# Altium PCB CAN_PDM_Pcb.PcbDoc (part 1 of 3)
Units mm, origin at the board's own origin, x right, y up, seen from the top; angles counter-clockwise.
Board outline 120 x 90 mm, 4 copper layers (Top Layer, Int1 (GND-PWR), Int2 (PWR-3V3), Bottom Layer), stack 1.51 mm thick; 313 components, 200 nets, 938 pads, 544 vias.
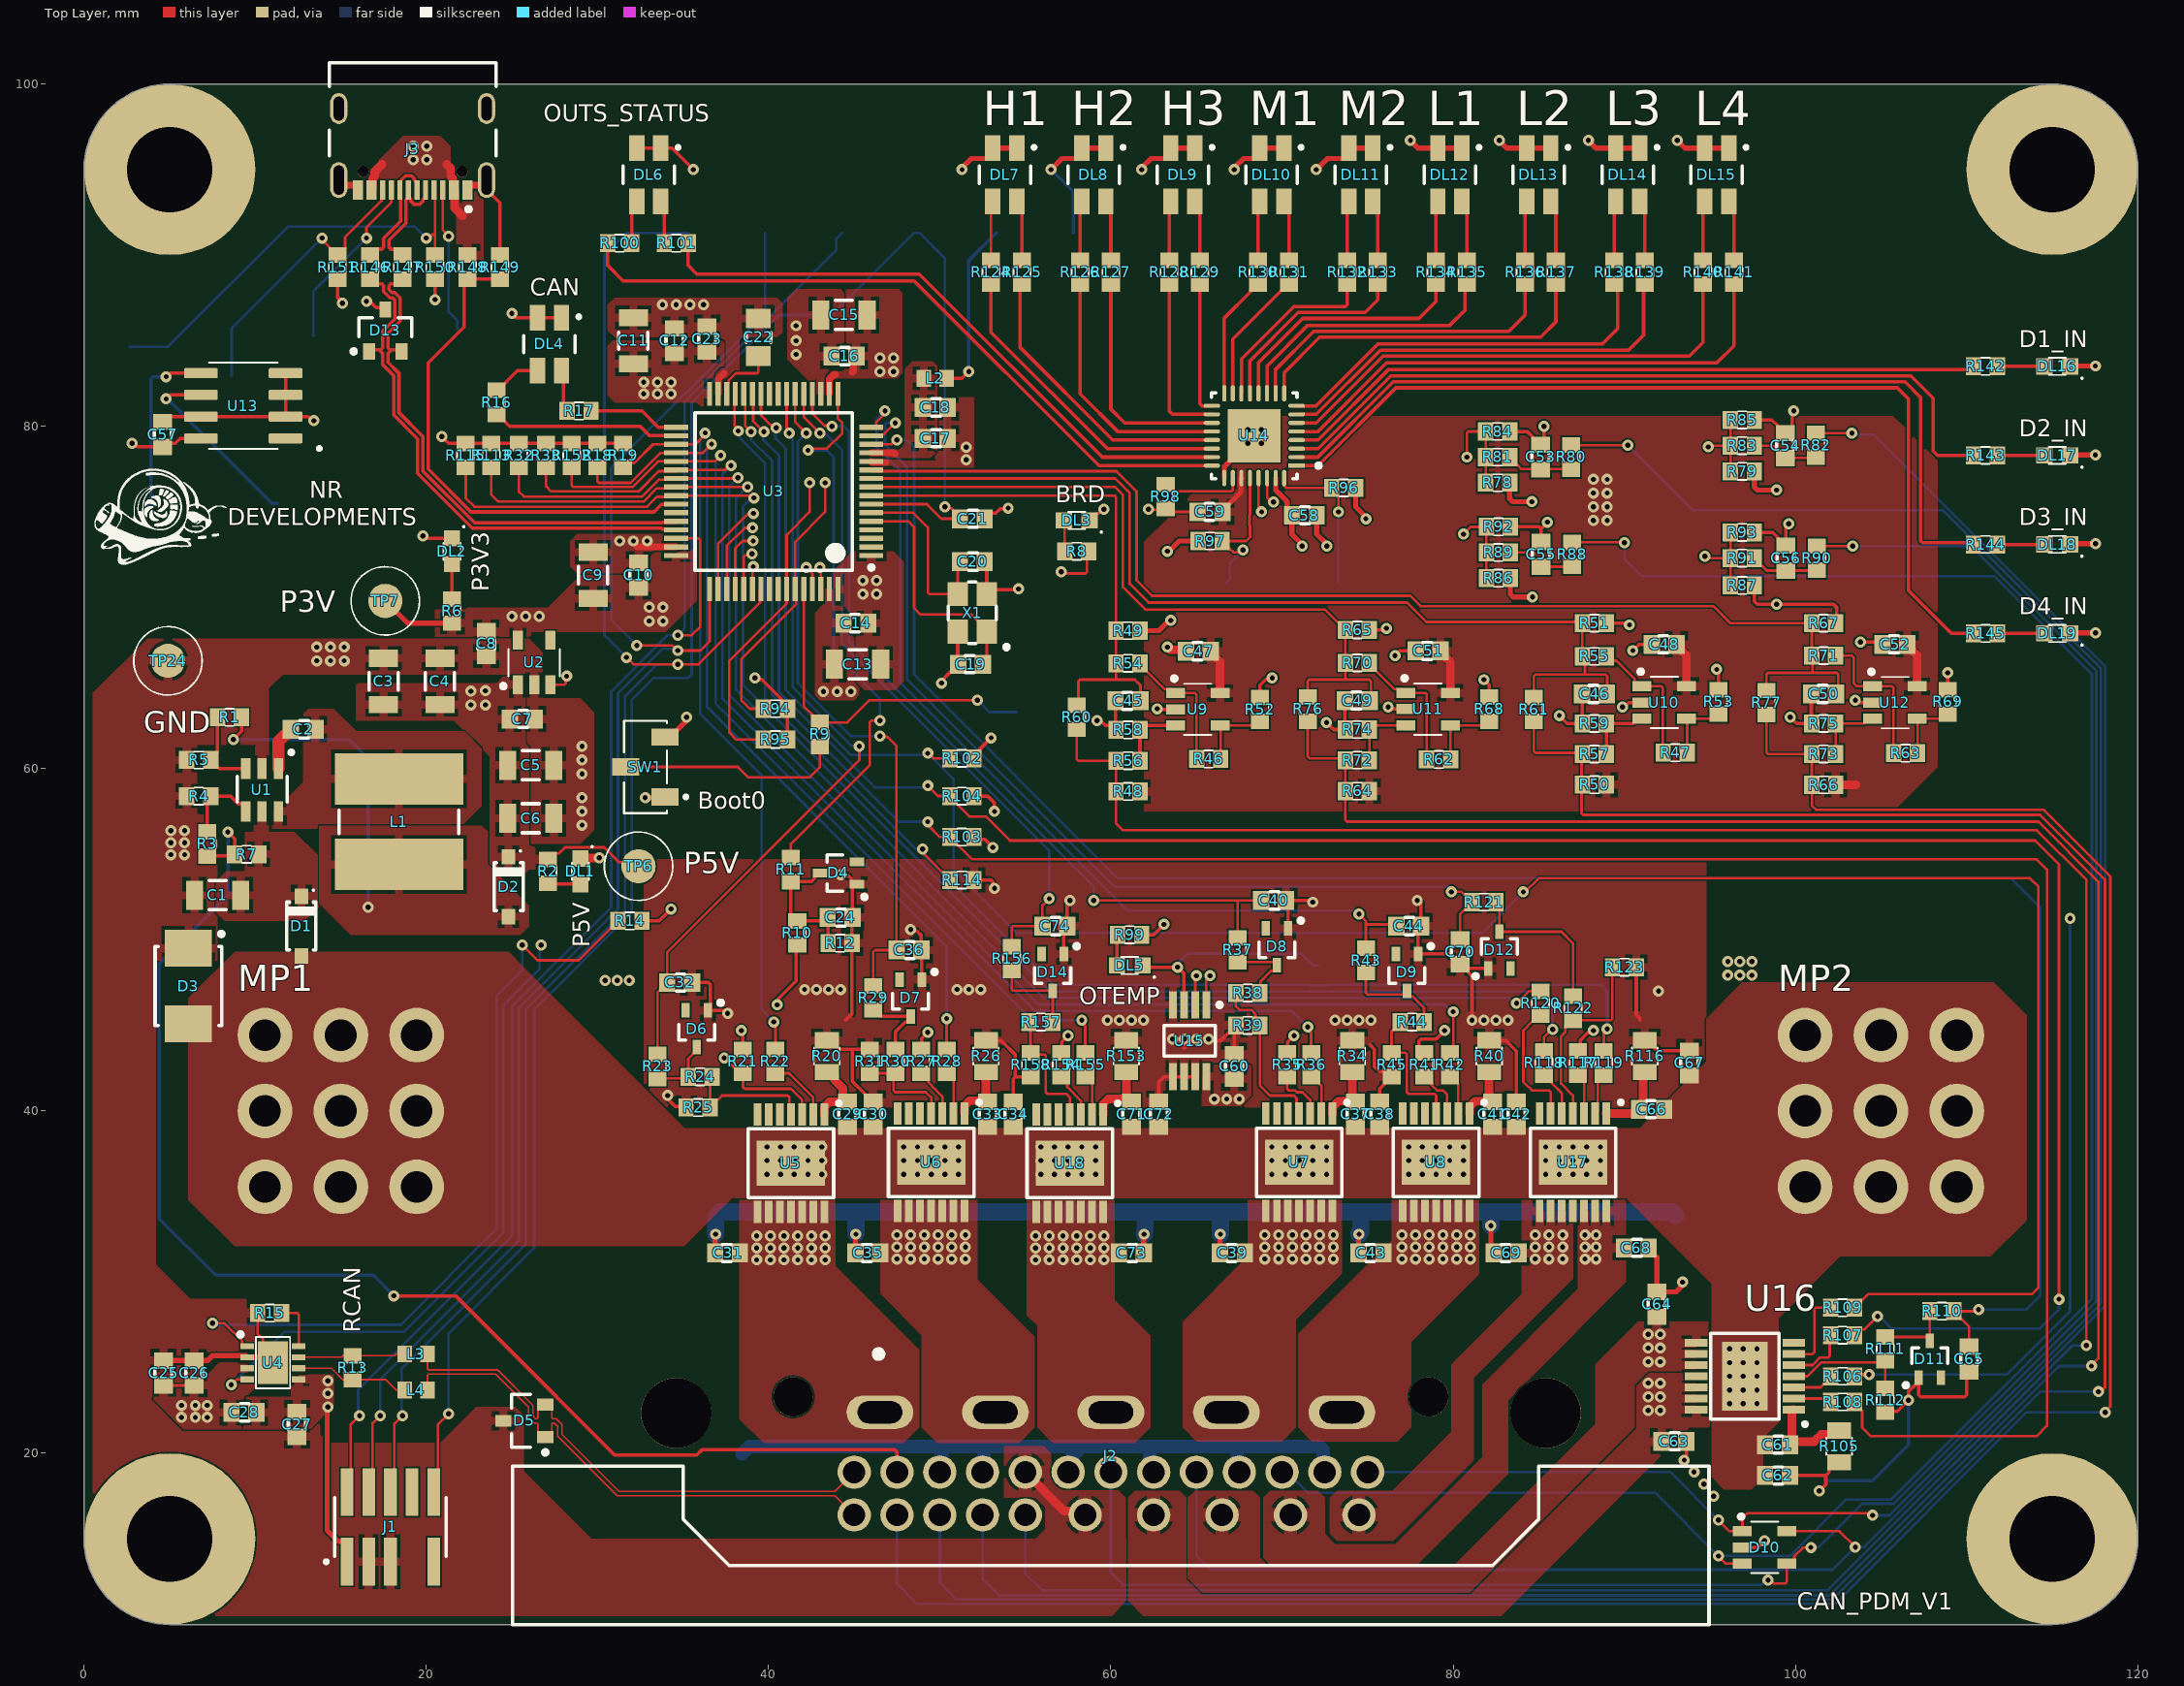
[diagram p0: Top Layer view]
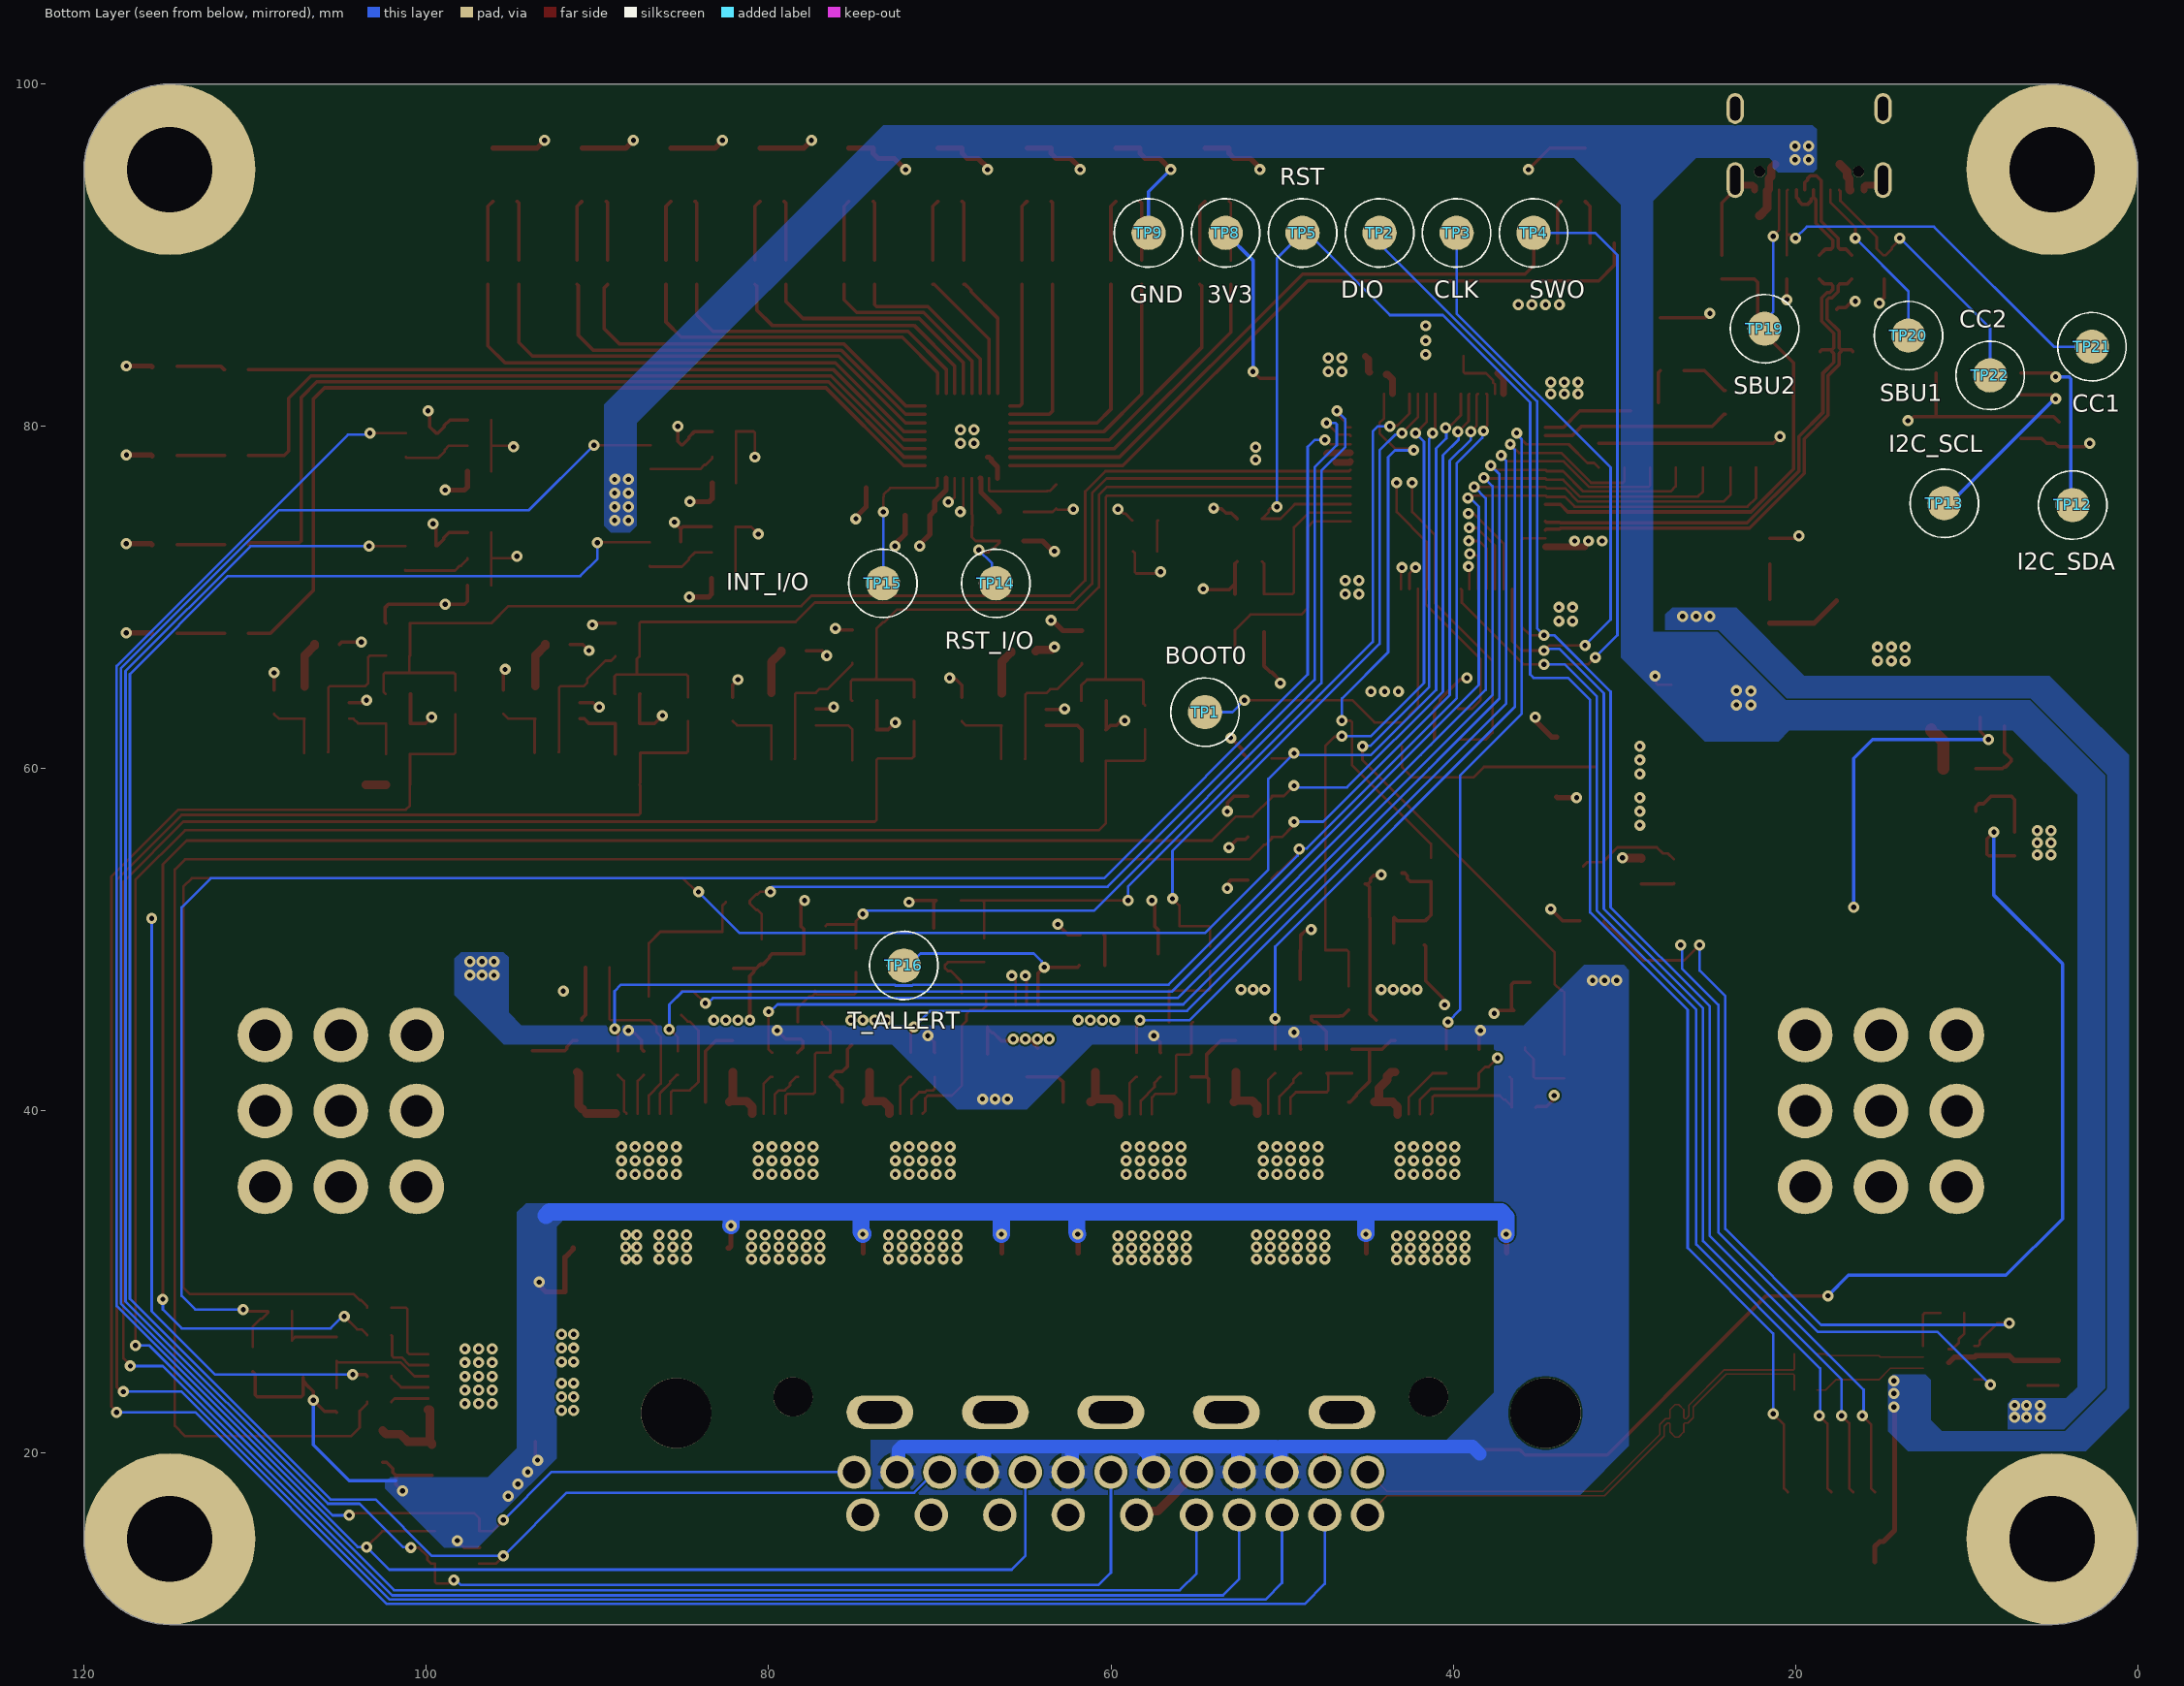
[diagram p1: Bottom Layer view, seen from below]
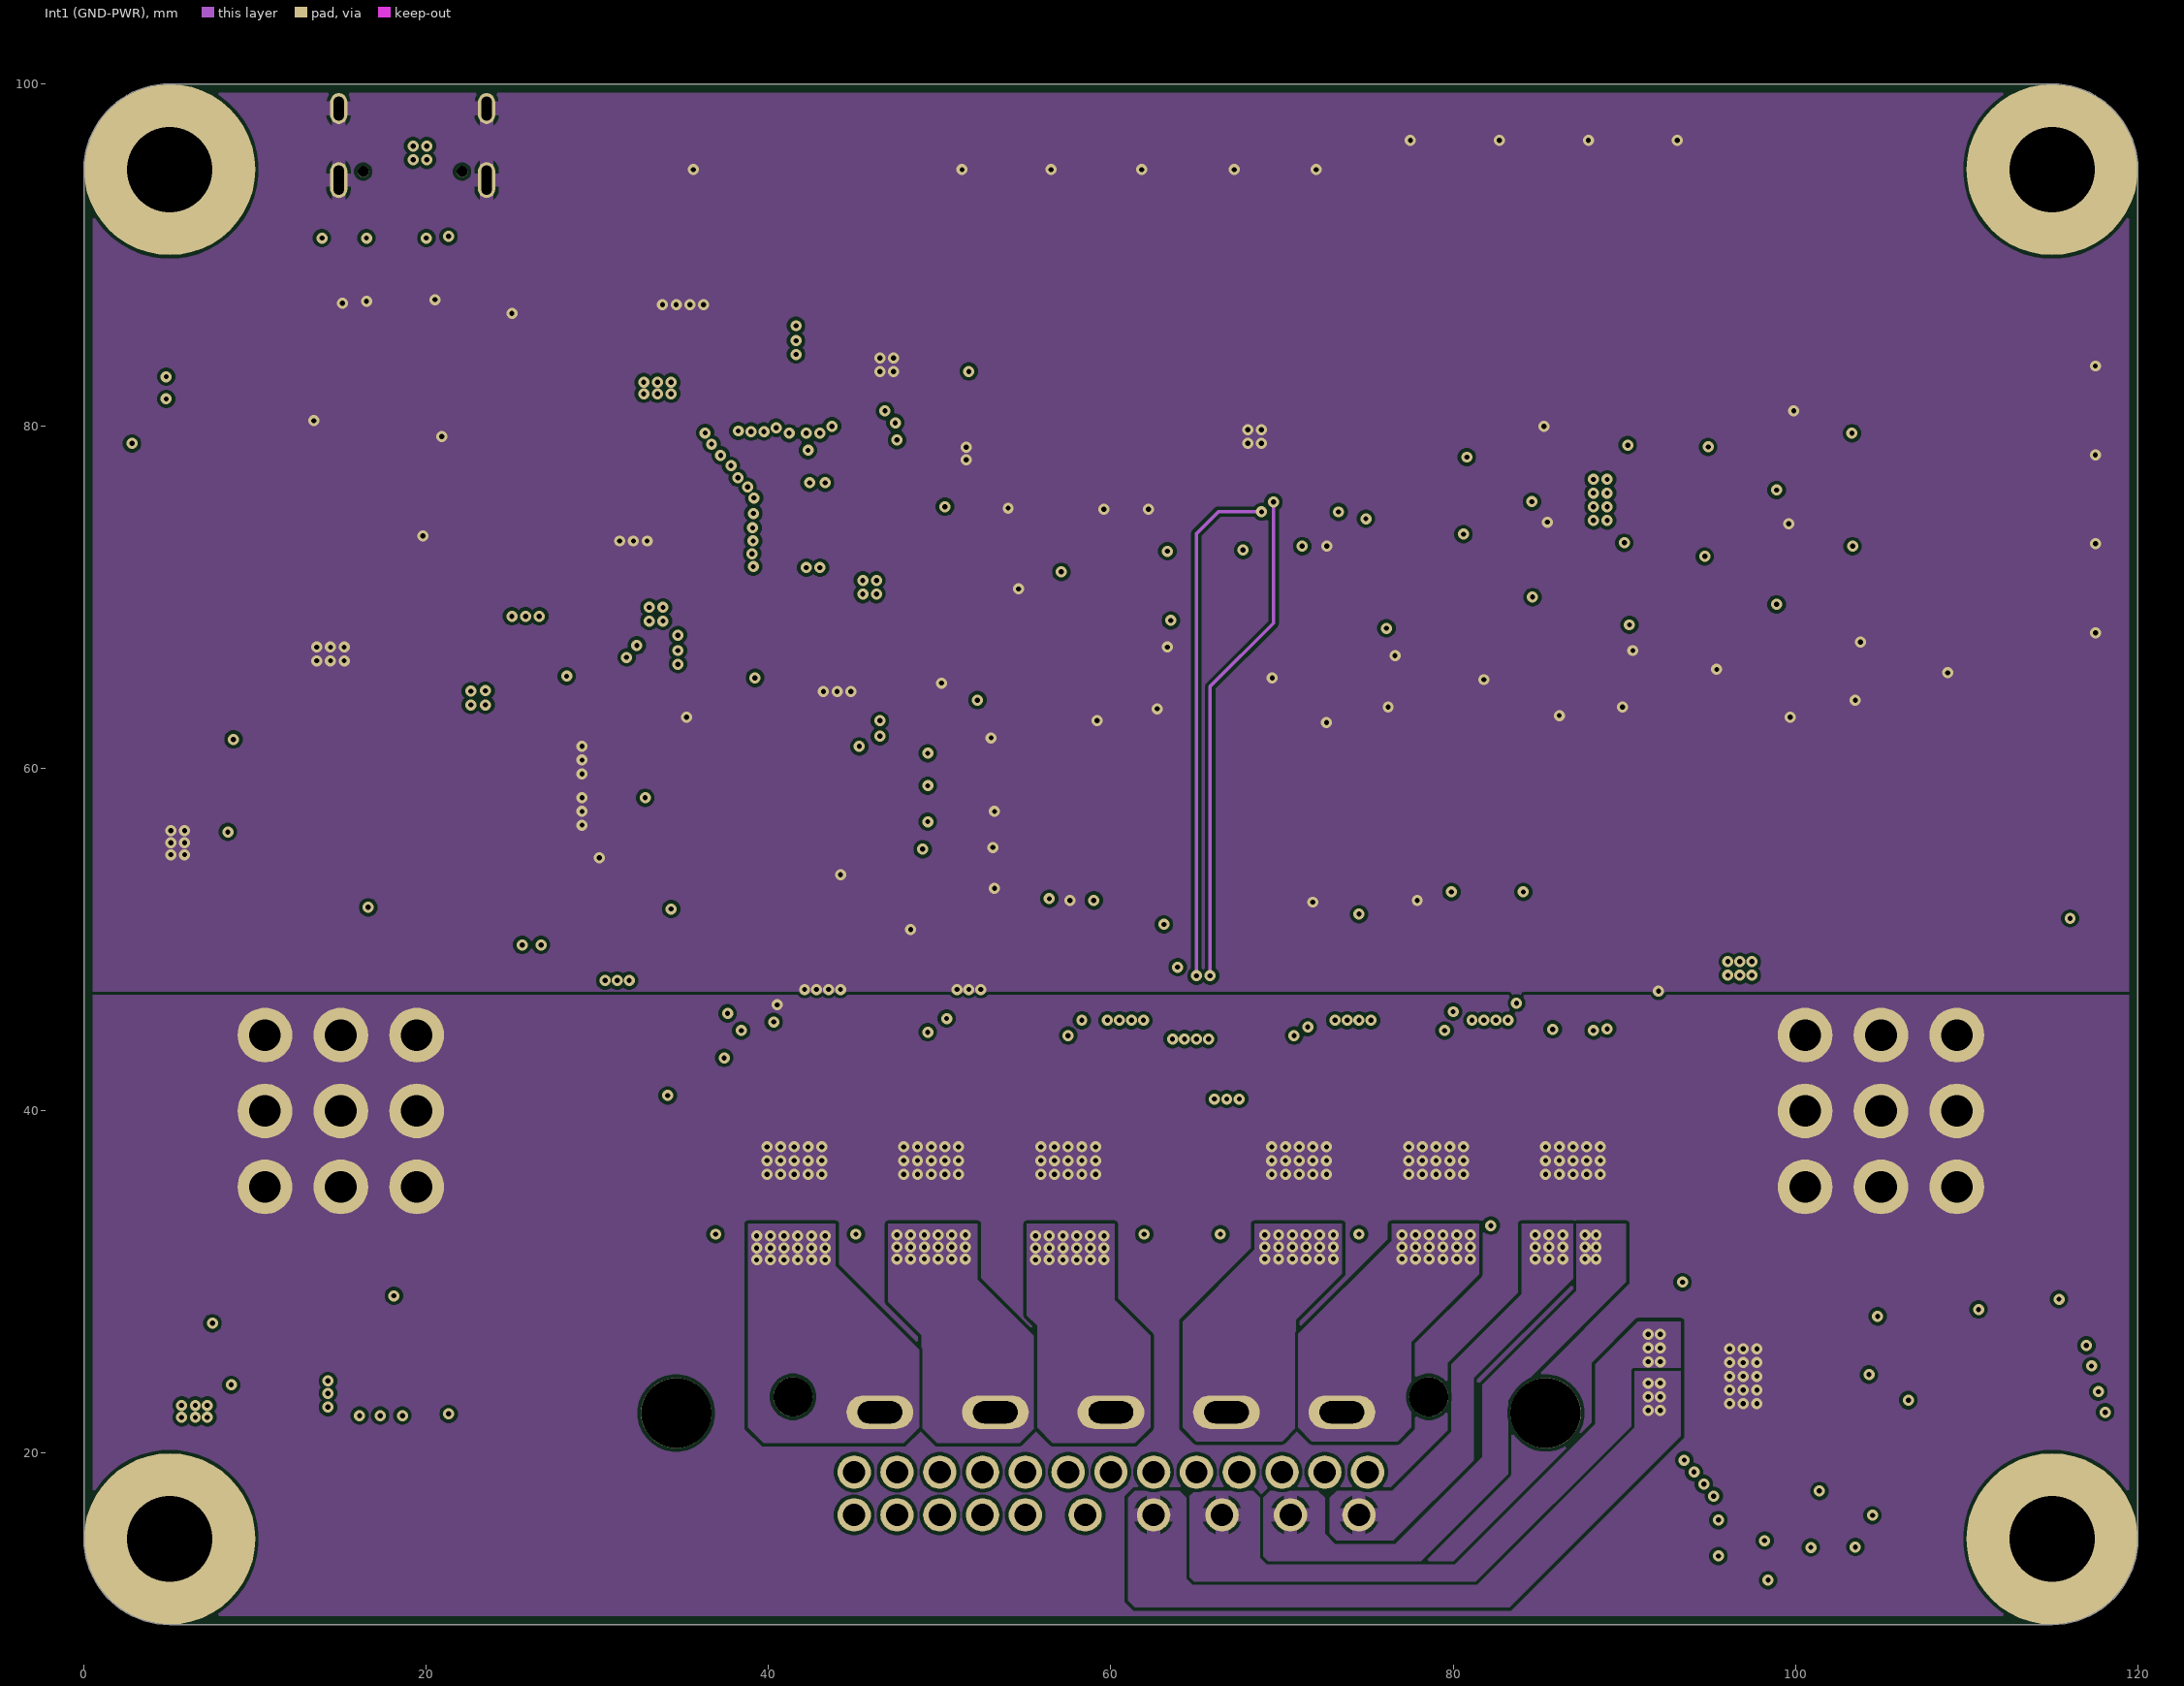
[diagram p2: Int1 (GND-PWR)]
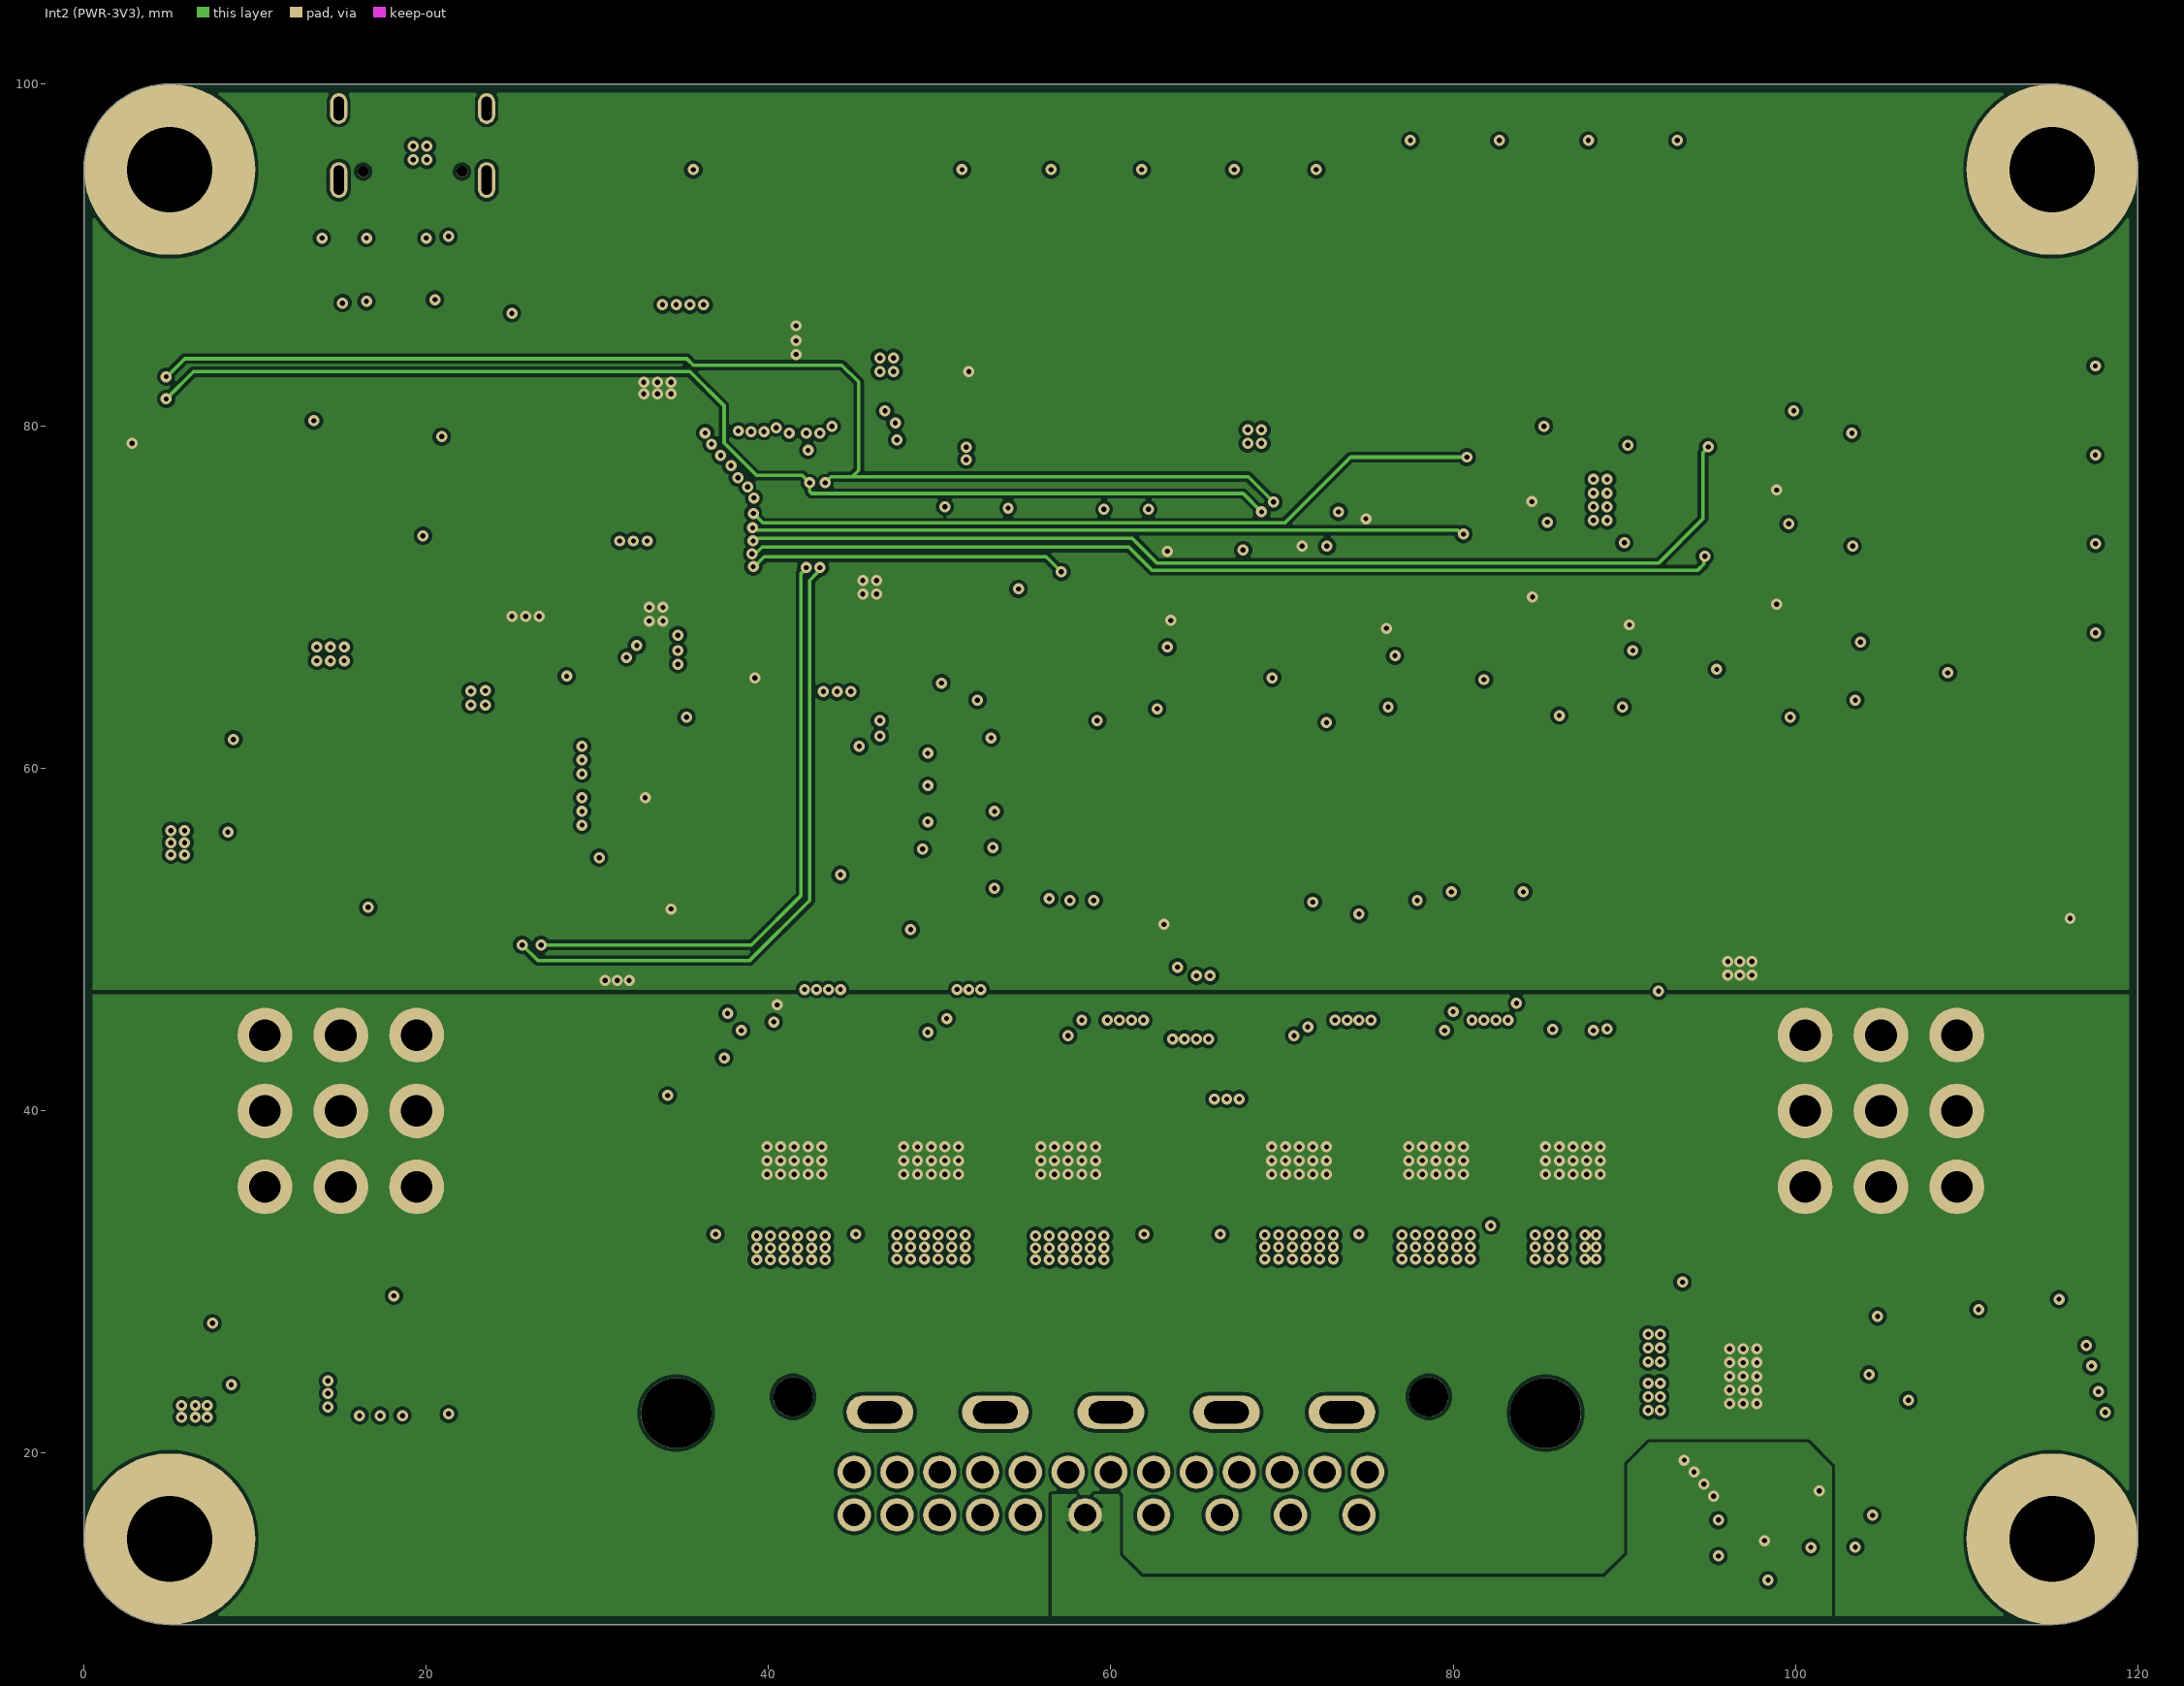
[diagram p3: Int2 (PWR-3V3)]
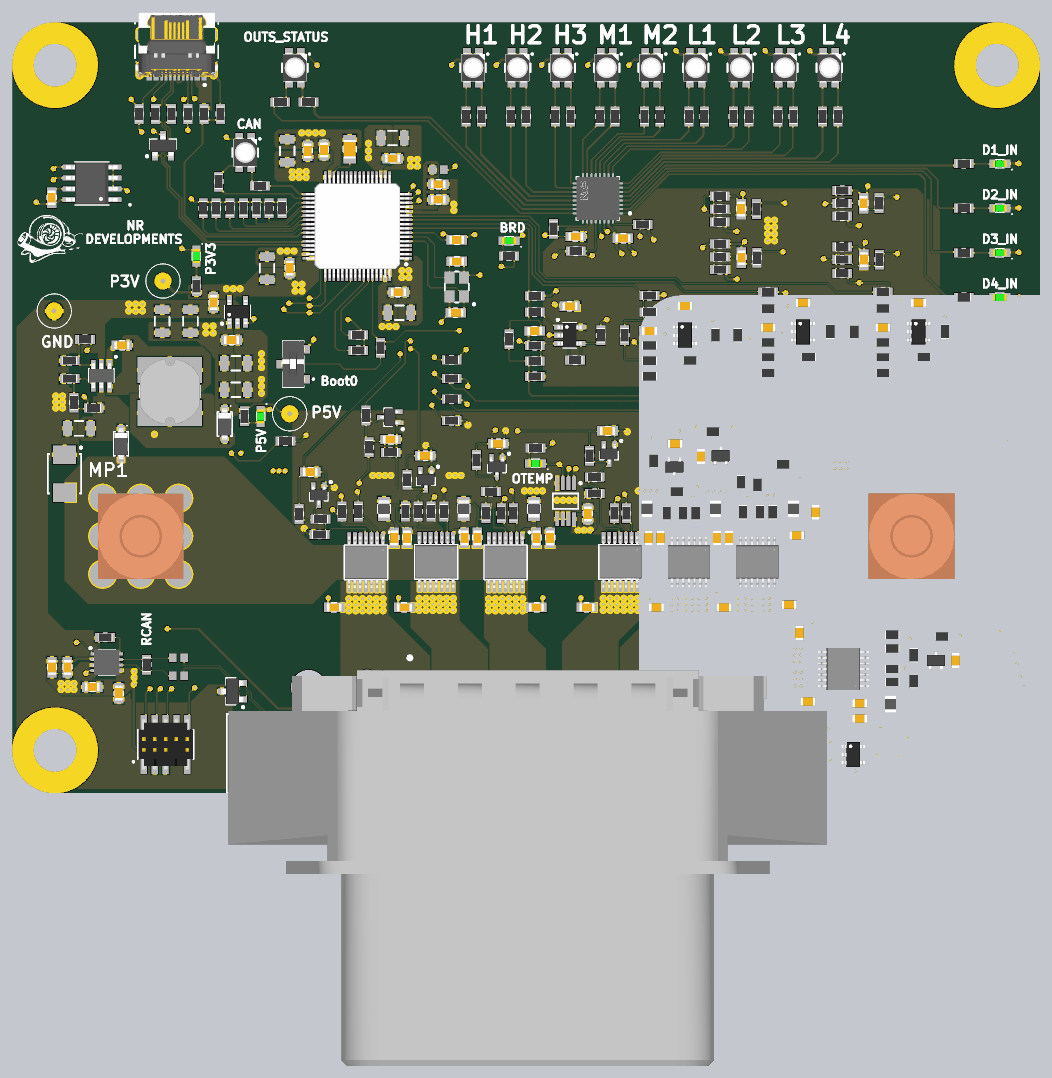
[diagram p6: 3D render of the assembled board from above, using the file's embedded part models]

## Layer stack, top to bottom
Top Solder: solder mask 0.0254, SM-001, Dk 4
Top Layer: signal copper 0.035
Dielectric 1: prepreg 0.125, PP-017, Dk 4.3
Dielectric 2: prepreg 0.125, PP-017, Dk 4.3
Int1 (GND-PWR): signal copper 0.07
Dielectric 3: core 0.8, Core-039, Dk 4.8
Int2 (PWR-3V3): signal copper 0.07
Dielectric 4: prepreg 0.125, PP-017, Dk 4.3
Dielectric 5: prepreg 0.125, PP-017, Dk 4.3
Bottom Layer: signal copper 0.035
Bottom Solder: solder mask 0.0254, SM-001, Dk 4

## Board outline
0,15 0,95 cw(c5,95) 5,100 115,100 cw(c115,95) 120,95 120,15 cw(c115,15) 115,10 5,10 cw(c5,15)

## Design rules (kind name [scope] priority, off if disabled: settings)
BoardOutlineClearance [All] p1: gap=0.5 ignorepadtopadclearanceinfootprint=FALSE
Clearance Clearance_int1 [OnLayer('Int1 (GND-PWR)')] p1: gap=0.2 ignorepadtopadclearanceinfootprint=TRUE
Clearance Clearance_int2 [OnLayer('Int2 (PWR-3V3)')] p2: gap=0.2 ignorepadtopadclearanceinfootprint=TRUE
Clearance Clearance_ALL [All] p3: gap=0.1 ignorepadtopadclearanceinfootprint=TRUE
DiffPairsRouting USB [InDifferentialPair('USBD')] p1: maxlimit=0.179 minlimit=0.11 mostfreqgap=0.179 toplayer_maxgap=0.11 toplayer_prefgap=0.11 toplayer_minwidth=0.2 toplayer_maxwidth=0.2 toplayer_prefwidth=0.2 midlayer1_mingap=0.179 midlayer1_minwidth=0.1 midlayer1_maxwidth=0.1 midlayer1_prefwidth=0.1 midlayer2_mingap=0.179 midlayer2_minwidth=0.1 midlayer2_maxwidth=0.1 midlayer2_prefwidth=0.1 bottomlayer_maxgap=0.11 bottomlayer_prefgap=0.11 bottomlayer_minwidth=0.2 bottomlayer_maxwidth=0.2 bottomlayer_prefwidth=0.2 impedanceprofiledriven=TRUE impedanceprofileid={897253C5-CBE6-43CE-975E-876387CCA2A0} impedanceprofilevalue=90.000000 maxuncoupledlength=12.7
DiffPairsRouting USB_1 [InDifferentialPair('MCU_USBD')] p2: maxlimit=0.179 minlimit=0.11 mostfreqgap=0.179 toplayer_maxgap=0.11 toplayer_prefgap=0.11 toplayer_minwidth=0.2 toplayer_maxwidth=0.2 toplayer_prefwidth=0.2 midlayer1_mingap=0.179 midlayer1_minwidth=0.1 midlayer1_maxwidth=0.1 midlayer1_prefwidth=0.1 midlayer2_mingap=0.179 midlayer2_minwidth=0.1 midlayer2_maxwidth=0.1 midlayer2_prefwidth=0.1 bottomlayer_maxgap=0.11 bottomlayer_prefgap=0.11 bottomlayer_minwidth=0.2 bottomlayer_maxwidth=0.2 bottomlayer_prefwidth=0.2 impedanceprofiledriven=TRUE impedanceprofileid={897253C5-CBE6-43CE-975E-876387CCA2A0} impedanceprofilevalue=90.000000 maxuncoupledlength=12.7
DiffPairsRouting CAN1 [InDifferentialPair('CAN0_IC')] p3: maxlimit=0.5 minlimit=0.151 mostfreqgap=0.5 toplayer_maxgap=0.151 toplayer_prefgap=0.151 toplayer_minwidth=0.1 toplayer_maxwidth=0.1 toplayer_prefwidth=0.1 midlayer1_mingap=0.5 midlayer1_minwidth=0.1 midlayer1_maxwidth=0.1 midlayer1_prefwidth=0.1 midlayer2_mingap=0.5 midlayer2_minwidth=0.1 midlayer2_maxwidth=0.1 midlayer2_prefwidth=0.1 bottomlayer_maxgap=0.151 bottomlayer_prefgap=0.151 bottomlayer_minwidth=0.1 bottomlayer_maxwidth=0.1 bottomlayer_prefwidth=0.1 impedanceprofiledriven=TRUE impedanceprofileid={D29A3864-303B-4307-AEF8-A4C566E0B745} impedanceprofilevalue=120.000000 maxuncoupledlength=12.7
DiffPairsRouting CAN [InDifferentialPair('CAN')] p4: maxlimit=0.5 minlimit=0.151 mostfreqgap=0.5 toplayer_maxgap=0.151 toplayer_prefgap=0.151 toplayer_minwidth=0.1 toplayer_maxwidth=0.1 toplayer_prefwidth=0.1 midlayer1_mingap=0.5 midlayer1_minwidth=0.1 midlayer1_maxwidth=0.1 midlayer1_prefwidth=0.1 midlayer2_mingap=0.5 midlayer2_minwidth=0.1 midlayer2_maxwidth=0.1 midlayer2_prefwidth=0.1 bottomlayer_maxgap=0.151 bottomlayer_prefgap=0.151 bottomlayer_minwidth=0.1 bottomlayer_maxwidth=0.1 bottomlayer_prefwidth=0.1 impedanceprofiledriven=TRUE impedanceprofileid={D29A3864-303B-4307-AEF8-A4C566E0B745} impedanceprofilevalue=120.000000 maxuncoupledlength=12.7
FabricationTestpoint [All] p1: side=3 testpointundercomponent=FALSE minsize=1.016 maxsize=2.54 preferedsize=1.524 minholesize=0 maxholesize=1.016 preferedholesize=0.813 testpointgrid=0.1 allowsidetop=TRUE allowsidebottom=TRUE usegrid=FALSE gridtolerance=0
Height [All] p1: minheight=0 maxheight=30 prefheight=12.7
HoleSize [All] p1: absolutevalues=TRUE maxlimit=6 minlimit=0.025 maxpercent=80.000 minpercent=20.000
HoleToHoleClearance [All] p1: gap=0.1 allowstackedmicrovias=TRUE
MatchedLengths RS485 [InDifferentialPair('RS485') OR InDifferentialPair('RS485_NF')] p1: tolerance=1 checknetsindiffpair=TRUE checkdiffpairvsdiffpair=FALSE checkxsignals=FALSE checkothers=FALSE
PolygonConnect PolygonConnect_Power [InNet('+12V')Or InNet('OUT_H1') Or  InNet('OUT_H2') Or InNet('OUT_H3')Or InNet('OUT_M1')Or InNet('OUT_M2')] p1: connectstyle=Direct reliefconductorwidth=0.254 reliefentries=4 polygonreliefangle="90 Angle" airgapwidth=0.254
PolygonConnect PolygonConnect_ALL [All] p2: thpad.connectstyle=Relief thpad.reliefconductorwidth=0.8 thpad.reliefentries=4 thpad.polygonreliefangle="90 Angle" thpad.airgapwidth=0.2 smdpad.connectstyle=Relief smdpad.reliefconductorwidth=0.5 smdpad.reliefentries=4 smdpad.polygonreliefangle="90 Angle" smdpad.airgapwidth=0.2 via.connectstyle=Direct via.reliefconductorwidth=0.254 via.reliefentries=4 via.polygonreliefangle="90 Angle" via.airgapwidth=0.254
RoutingVias [All] p1: holewidth=0.3 width=0.65 viastyle="Through Hole" minholewidth=0.3 minwidth=0.65 maxholewidth=0.5 maxwidth=1
SilkToSolderMaskClearance [IsPad] p1: minsilkscreentomaskgap=0.1 clearancetoexposedcopper=TRUE
SolderMaskExpansion SolderMaskExpansion_VIA [IsVia] p1: expansion=-1 istentingtop=FALSE
SolderMaskExpansion [All] p2: expansion=0.102 istentingtop=FALSE
SupplyNets "Schematic Supply Nets_1" [InNet('+12VPRT')] p1: voltage=0.000
SupplyNets "Schematic Supply Nets_5" [InNet('+12V')] p2: voltage=0.000
SupplyNets "Schematic Supply Nets_4" [InNet('IGNITION')] p3: voltage=0.000
SupplyNets "Schematic Supply Nets_3" [InNet('GND')] p4: voltage=0.000
SupplyNets "Schematic Supply Nets_2" [InNet('+3V3')] p5: voltage=0.000
SupplyNets "Schematic Supply Nets" [InNet('5V')] p6: voltage=0.000
ViasUnderSMD [All] p1: allowed=FALSE
Width [All] p1: maxlimit=1 minlimit=0.15 preferedwidth=0.2 toplayer_prefwidth=0.15 midlayer1_minwidth=0.2 midlayer2_minwidth=0.2 bottomlayer_prefwidth=0.15 minimp=50.000000 maximp=50.000000 favimp=50.000000
24 further rules are at their usual default settings.

## Classes and differential pairs
component class USB: D13 J3 R146 R147 R148 R149 R150 R151 TP19 TP20 TP21 TP22
component class SENSOR_INP: C45 C46 C47 C48 C49 C50 C51 C52 R46 R47 R48 R49 R50 R51 R52 R53 R54 R55 R56 R57 R58 R59 R60 R61 R62 R63 R64 R65 R66 R67 R68 R69 R70 R71 R72 R73 R74 R75 R76 R77 U9 U10 U11 U12
component class PWR: C1 C2 C3 C4 C5 C6 C7 C8 D1 D2 D3 DL1 DL2 L1 MP1 MP2 R1 R2 R3 R4 R5 R6 R7 TP6 TP7 TP24 U1 U2
component class MID_CURR_MOS: C37 C38 C39 C40 C41 C42 C43 C44 D8 D9 R32 R33 R34 R35 R36 R37 R38 R39 R40 R41 R42 R43 R44 R45 U7 U8
component class MCU: C9 C10 C11 C12 C13 C14 C15 C16 C17 C18 C19 C20 C21 C22 C23 C24 D4 DL3 J1 L2 R8 R9 R10 R11 R12 SW1 TP1 TP2 TP3 TP4 TP5 TP8 TP9 U3 X1
component class LOW_CURR_MOS: C61 C62 C63 C64 C65 C66 C67 C68 C69 C70 D11 D12 R102 R103 R104 R105 R106 R107 R108 R109 R110 R111 R112 R113 R114 R115 R116 R117 R118 R119 R120 R121 R122 R123 U16 U17
component class LED_STATUS_OUTPUTS: DL7 DL8 DL9 DL10 DL11 DL12 DL13 DL14 DL15 R124 R125 R126 R127 R128 R129 R130 R131 R132 R133 R134 R135 R136 R137 R138 R139 R140 R141
component class LED_STATUS_INPUT: DL16 DL17 DL18 DL19 R142 R143 R144 R145
component class I2C: C57 C58 C59 C60 DL5 DL6 R94 R95 R96 R97 R98 R99 R100 R101 TP12 TP13 TP14 TP15 TP16 U13 U14 U15
component class HIGH_CURR_MOS: C29 C30 C31 C32 C33 C34 C35 C36 D6 D7 R18 R19 R20 R21 R22 R23 R24 R25 R26 R27 R28 R29 R30 R31 U5 U6
component class HIGH_CURR_MOS2: C71 C72 C73 C74 D14 R152 R153 R154 R155 R156 R157 R158 U18
component class DIGITAL_INP: C53 C54 C55 C56 D10 R78 R79 R80 R81 R82 R83 R84 R85 R86 R87 R88 R89 R90 R91 R92 R93
component class CONNECTOR: J2
component class CAN: C25 C26 C27 C28 D5 DL4 L3 L4 R13 R14 R15 R16 R17 U4
differential pair USBD: +USBD_P -USBD_N
differential pair MCU_USBD: +MCU_USBD_P -MCU_USBD_N
differential pair CAN: +CAN_P -CAN_N
differential pair CAN0_IC: +CAN0_IC_P -CAN0_IC_N

## Components (designator, comment, footprint, x,y, rotation, side; value= is the part's Value field where it differs from the comment)
C1 "CAP" CAPC3216X16M 7.8,52.6 r180 top value=2u2
C2 "CAP" CAPC1608X09M 12.8,62.3 r0 top value=100n
C3 "CAP" CAPC3216X16M 17.5,65.1 r90 top value=10u
C4 "CAP" CAPC3216X16M 20.8,65.1 r90 top value=10u
C5 "CAP" CAPC3216X16M 26.1,60.2 r0 top value=10u
C6 "CAP" CAPC3216X16M 26.1,57.1 r0 top value=10u
C7 "CAP" CAPC1608X09M 25.6,62.9 r0 top value=1u
C8 "CAP" CAPC1608X09M 23.5,67.3 r270 top value=1u
C9 "CAP" CAPC3216X16M 29.75,71.3 r90 top value=10u
C10 "CAP" CAPC1608X09M 32.4,71.3 r90 top value=100n
C11 "CAP" CAPC3216X16M 32.1,85 r90 top value=10u
C12 "CAP" CAPC1608X09M 34.5,85 r90 top value=100n
C13 "CAP" CAPC3216X16M 45.2,66.1 r180 top value=10u
C14 "CAP" CAPC1608X09M 45.1,68.5 r180 top value=100n
C15 "CAP" CAPC3216X16M 44.4,86.5 r0 top value=10u
C16 "CAP" CAPC1608X09M 44.4,84.1 r0 top value=100n
C17 "CAP" CAPC1608X09M 49.735,79.3 r0 top value=100n
C18 "CAP" CAPC1608X09M 49.735,81.1 r0 top value=1u
C19 "CAP" CAPC1608X09M 51.8,66.1 r180 top value=27p
C20 "CAP" CAPC1608X09M 51.9,72.1 r0 top value=27p
C21 "CAP" CAPC1608X09M 51.9,74.6 r0 top value=100n
C22 "CAP" CAPC2012X14N 39.4,85.2 r90 top value=4u7
C23 "CAP" CAPC1608X09M 36.4,85.1 r90 top value=100n
C24 "CAP" CAPC1608X09M 44.175,51.3 r0 top value=100n
C25 "CAP" CAPC1608X09M 4.638,24.69 r90 top value=100n
C26 "CAP" CAPC1608X09M 6.438,24.69 r90 top value=47n
C27 "CAP" CAPC1608X09M 12.438,21.69 r270 top value=100n
C28 "CAP" CAPC1608X09M 9.338,22.39 r0 top value=100n
C29 "CAP" CAPC1608X09M 44.6,39.8 r90 top value=47n
C30 "CAP" CAPC1608X09M 46.1,39.8 r90 top value=100n
C31 "CAP" CAPC1608X09M 37.6,31.7 r180 top value=10n
C32 "CAP" CAPC1608X09M 34.8,47.5 r0 top value=220p
C33 "CAP" CAPC1608X09M 52.8,39.8 r90 top value=47n
C34 "CAP" CAPC1608X09M 54.3,39.8 r90 top value=100n
C35 "CAP" CAPC1608X09M 45.8,31.7 r180 top value=10n
C36 "CAP" CAPC1608X09M 48.2,49.4 r0 top value=220p
C37 "CAP" CAPC1608X09M 74.3,39.8 r90 top value=47n
C38 "CAP" CAPC1608X09M 75.7,39.8 r90 top value=100n
C39 "CAP" CAPC1608X09M 67.1,31.7 r180 top value=10n
C40 "CAP" CAPC1608X09M 69.5,52.3 r0 top value=220p
C41 "CAP" CAPC1608X09M 82.3,39.8 r90 top value=47n
C42 "CAP" CAPC1608X09M 83.7,39.8 r90 top value=100n
C43 "CAP" CAPC1608X09M 75.2,31.7 r180 top value=10n
C44 "CAP" CAPC1608X09M 77.4,50.8 r0 top value=220p
C45 "CAP" CAPC1608X09M 61,63.961 r180 top
C46 "CAP" CAPC1608X09M 88.25,64.361 r180 top
C47 "CAP" CAPC1608X09M 65.112,66.861 r180 top value=100n
C48 "CAP" CAPC1608X09M 92.33,67.261 r180 top value=100n
C49 "CAP" CAPC1608X09M 74.4,63.975 r180 top
C50 "CAP" CAPC1608X09M 101.65,64.361 r180 top
C51 "CAP" CAPC1608X09M 78.536,66.875 r180 top value=100n
C52 "CAP" CAPC1608X09M 105.812,67.261 r180 top value=100n
C53 "CAP" CAPC1608X09M 85.1,78.2 r90 top value=10n
C54 "CAP" CAPC1608X09M 99.4,78.875 r90 top value=10n
C55 "CAP" CAPC1608X09M 85.139,72.525 r90 top value=10n
C56 "CAP" CAPC1608X09M 99.439,72.3 r90 top value=10n
C57 "CAP" CAPC1608X09M 4.6,79.525 r90 top value=100n
C58 "CAP" CAPC1608X09M 71.3,74.8 r0 top value=100n
C59 "CAP" CAPC1608X09M 65.8,75 r180 top value=1u
C60 "CAP" CAPC1608X09M 67.2,42.6 r90 top value=1u
C61 "CAP" CAPC1608X09M 98.95,20.5 r0 top value=47n
C62 "CAP" CAPC1608X09M 98.95,18.7 r0 top value=100n
C63 "CAP" CAPC1608X09M 92.9,20.7 r0 top value=10n
C64 "CAP" CAPC1608X09M 91.9,28.7 r90 top value=10n
C65 "CAP" CAPC1608X09M 110.15,25.5 r270 top value=220p
C66 "CAP" CAPC1608X09M 91.6,40.1 r180 top value=47n
C67 "CAP" CAPC1608X09M 93.8,42.8 r90 top value=100n
C68 "CAP" CAPC1608X09M 90.7,32 r0 top value=10n
C69 "CAP" CAPC1608X09M 83.1,31.7 r180 top value=10n
C70 "CAP" CAPC1608X09M 80.4,49.3 r270 top value=220p
C71 "CAP" CAPC1608X09M 61.2,39.8 r90 top value=47n
C72 "CAP" CAPC1608X09M 62.8,39.8 r90 top value=100n
C73 "CAP" CAPC1608X09M 61.195,31.7 r0 top value=10n
C74 "CAP" CAPC1608X09M 56.725,50.8 r0 top value=220p
D1 "Diode_Schottky" "SODFL360X130-2M -AC" 12.7,50.8 r270 top value=PMEG4010EGWX
D2 "Diode_Schottky" "SODFL360X130-2M -AC" 24.8,53.1 r270 top value=PMEG4010EGWX
D3 "Diode" ONSC-SMB-2 6.1,47.3 r270 top value=SZ1SMB20CAT3G
D4 "Diode_Schottky" "SOT65P210X100-3N - AC" 44.075,53.9 r180 top value=4V7
D5 "ESD_Diode" SOT95P240X120-3N 25.725,21.9 r180 top value=SM712-02HTG
D6 "Diode_Schottky" "SOT65P210X100-3N - AC" 35.8,44.8 r270 top value=5V
D7 "Diode_Schottky" "SOT65P210X100-3N - AC" 48.3,46.6 r270 top value=5V
D8 "Diode_Schottky" "SOT65P210X100-3N - AC" 69.7,49.6 r270 top value=5V
D9 "Diode_Schottky" "SOT65P210X100-3N - AC" 77.3,48.1 r270 top value=5V
D10 "Diode TVS" SOT95P280X145-5N 98.2,14.5 r0 top value=SP0504BAHTG
D11 "Diode_Schottky" "SOT65P210X100-3N - AC" 107.85,25.5 r90 top value=5V
D12 "Diode_Schottky" "SOT65P210X100-3N - AC" 82.7,49.4 r90 top value=5V
D13 "SM712-02HTG" SOT95P240X120-3N 17.6,85.6 r90 top
D14 "Diode_Schottky" "SOT65P210X100-3N - AC" 56.6,48.1 r270 top value=5V
DL1 "Led_Green" LED0603 29,54 r270 top value=150060GS75000
DL2 "Led_Green" LED0603 21.5,72.7 r270 top value=150060GS75000
DL3 "Led_Green" LED0603 58,74.5 r180 top value=150060BS75000
DL4 "LED_Yellow_Blue" WURTH-SBTW_3528 27.2,84.8 r270 top value=150141YB73100
DL5 "LED_Red" LED0603 61.1,48.5 r180 top value=150060RS75000
DL6 "LED_Yellow_Blue" WURTH-SBTW_3528 33,94.7 r270 top value=150141YB73100
DL7 "LED_Red_Green" WURTH-SBTW_3528 53.8,94.7 r270 top value=150141RV73100
DL8 "LED_Red_Green" WURTH-SBTW_3528 59,94.7 r270 top value=150141RV73100
DL9 "LED_Red_Green" WURTH-SBTW_3528 64.2,94.7 r270 top value=150141RV73100
DL10 "LED_Red_Green" WURTH-SBTW_3528 69.4,94.7 r270 top value=150141RV73100
DL11 "LED_Red_Green" WURTH-SBTW_3528 74.6,94.7 r270 top value=150141RV73100
DL12 "LED_Red_Green" WURTH-SBTW_3528 79.8,94.7 r270 top value=150141RV73100
DL13 "LED_Red_Green" WURTH-SBTW_3528 85,94.7 r270 top value=150141RV73100
DL14 "LED_Red_Green" WURTH-SBTW_3528 90.2,94.7 r270 top value=150141RV73100
DL15 "LED_Red_Green" WURTH-SBTW_3528 95.4,94.7 r270 top value=150141RV73100
DL16 "Led_Green" LED0603 115.3,83.5 r180 top value=150060BS55040
DL17 "Led_Green" LED0603 115.3,78.3 r180 top value=150060BS55040
DL18 "Led_Green" LED0603 115.3,73.1 r180 top value=150060BS55040
DL19 "Led_Green" LED0603 115.3,67.9 r180 top value=150060BS55040
J1 "Connector" SAMTEC_FTSH-105-X-X-DV-007-P-X 17.9,15.7 r0 top value=FTSH-105-01-L-DV-007-K
J2 "Connector" MOLEX_0477450100 60,19.85 r0 top locked value=477450100
J3 "USB4105-GF-A" GCT-USB4105-GF-A 19.2,97.4 r180 top
L1 "IND" BOURNS_SDE0805A 18.4,56.9 r270 top value=18u
L2 "IND" INDC1608X09N 49.735,82.8 r180 top value="600 R"
L3 "IND" INDC1608X09N 19.4,25.8 r0 top value=BLM18HB331SN1D
L4 "IND" INDC1608X09N 19.4,23.7 r0 top value=BLM18HB331SN1D
MP1 "Connector" WURTH_74651195 15,40 r0 top value=74651195R
MP2 "Connector" WURTH_74651195 105,40 r0 top value=74651195R
R1 "Res" RESC1608X06M 8.5,63 r0 top value=88K7
R2 "Res" RESC1608X06M 27.1,54 r90 top value=1K3
R3 "Res" RESC1608X06M 7.2,55.6 r90 top value=10K
R4 "Res" RESC1608X06M 6.7,58.4 r0 top value=10K
R5 "Res" RESC1608X06M 6.7,60.5 r0 top value=22K1
R6 "Res" RESC1608X06M 21.5,69.2 r270 top value=560R
R7 "Res" RESC1608X06M 9.5,55 r180 top value=0R
R8 "Res" RESC1608X06M 58,72.7 r0 top value=560R
R9 "Res" RESC1608X06M 43,62 r90 top value=10K
R10 "Res" RESC1608X06M 41.675,50.4 r270 top value=51K
R11 "Res" RESC1608X06M 41.3,54.1 r90 top value=0R
R12 "Res" RESC1608X06M 44.175,49.8 r180 top value=7K5
R13 "Res" RESC1608X06M 15.7,25 r90 top value=120R
R14 "Res" RESC1608X06M 31.9,51.1 r0 top value=10K
R15 "Res" RESC1608X06M 10.838,28.19 r0 top value=10K
R16 "Res" RESC1608X06M 24.1,81.4 r270 top value=1K3
R17 "Res" RESC1608X06M 28.925,80.9 r0 top value=1K3
R18 "Res" RESC1608X06M 30,78.3 r270 top value=10K
R19 "Res" RESC1608X06M 31.5,78.3 r270 top value=10K
R20 "Res" RESC2012X06N 43.4,43.2 r90 top value=47R
R21 "Res" RESC1608X06M 38.5,42.9 r90 top value=4K7
R22 "Res" RESC1608X06M 40.4,42.9 r270 top value=4K7
R23 "Res" RESC1608X06M 33.5,42.6 r270 top value=4K7
R24 "Res" RESC1608X06M 36,42 r0 top value=4K7
R25 "Res" RESC1608X06M 35.875,40.2 r0 top value=1K2
R26 "Res" RESC2012X06N 52.7,43.2 r90 top value=47R
R27 "Res" RESC1608X06M 48.9,42.9 r90 top value=4K7
R28 "Res" RESC1608X06M 50.4,42.9 r270 top value=4K7
R29 "Res" RESC1608X06M 46.1,46.6 r270 top value=4K7
R30 "Res" RESC1608X06M 47.4,42.9 r270 top value=4K7
R31 "Res" RESC1608X06M 45.9,42.9 r270 top value=1K2
R32 "Res" RESC1608X06M 25.4,78.3 r270 top value=10K
R33 "Res" RESC1608X06M 27,78.3 r270 top value=10K
R34 "Res" RESC2012X06N 74.1,43.2 r90 top value=47R
R35 "Res" RESC1608X06M 70.3,42.7 r90 top value=4K7
R36 "Res" RESC1608X06M 71.7,42.7 r270 top value=4K7
R37 "Res" RESC1608X06M 67.4,49.4 r270 top value=4K7
R38 "Res" RESC1608X06M 68,46.9 r180 top value=4K7
R39 "Res" RESC1608X06M 68,45 r0 top value=1K2
R40 "Res" RESC2012X06N 82.1,43.2 r90 top value=47R
R41 "Res" RESC1608X06M 78.3,42.7 r90 top value=4K7
R42 "Res" RESC1608X06M 79.8,42.7 r270 top value=4K7
R43 "Res" RESC1608X06M 74.9,48.8 r270 top value=4K7
R44 "Res" RESC1608X06M 77.6,45.2 r180 top value=4K7
R45 "Res" RESC1608X06M 76.4,42.7 r90 top value=1K2
R46 "Res" RESC1608X06M 65.712,60.561 r0 top value=10K
R47 "Res" RESC1608X06M 92.975,60.927 r0 top value=10K
R48 "Res" RESC1608X06M 61,58.661 r0 top value=0R
R49 "Res" RESC1608X06M 61,68.061 r0 top value=0R
R50 "Res" RESC1608X06M 88.25,59.061 r0 top value=0R
R51 "Res" RESC1608X06M 88.25,68.497 r0 top value=0R
R52 "Res" RESC1608X06M 68.712,63.461 r90 top value=15K
R53 "Res" RESC1608X06M 95.5,63.9 r90 top value=15K
R54 "Res" RESC1608X06M 61,66.161 r180 top value=0R
R55 "Res" RESC1608X06M 88.25,66.561 r180 top value=0R
R56 "Res" RESC1608X06M 61,60.461 r0 top value=15K
R57 "Res" RESC1608X06M 88.25,60.852 r0 top value=15K
R58 "Res" RESC1608X06M 61,62.261 r0 top value=10K
R59 "Res" RESC1608X06M 88.25,62.639 r0 top value=10K
R60 "Res" RESC1608X06M 58,63 r90 top value=0R
R61 "Res" RESC1608X06M 84.712,63.461 r90 top value=0R
R62 "Res" RESC1608X06M 79.148,60.536 r0 top value=10K
R63 "Res" RESC1608X06M 106.435,60.903 r0 top value=10K
R64 "Res" RESC1608X06M 74.4,58.687 r0 top value=0R
R65 "Res" RESC1608X06M 74.4,68.101 r0 top value=0R
R66 "Res" RESC1608X06M 101.658,59.054 r0 top value=0R
R67 "Res" RESC1608X06M 101.65,68.5 r0 top value=0R
R68 "Res" RESC1608X06M 82.093,63.475 r90 top value=15K
R69 "Res" RESC1608X06M 108.9,63.9 r90 top value=15K
R70 "Res" RESC1608X06M 74.4,66.175 r180 top value=0R
R71 "Res" RESC1608X06M 101.65,66.6 r180 top value=0R
R72 "Res" RESC1608X06M 74.4,60.497 r0 top value=15K
R73 "Res" RESC1608X06M 101.65,60.857 r0 top value=15K
R74 "Res" RESC1608X06M 74.4,62.284 r0 top value=10K
R75 "Res" RESC1608X06M 101.65,62.639 r0 top value=10K
R76 "Res" RESC1608X06M 71.5,63.475 r90 top value=0R
R77 "Res" RESC1608X06M 98.312,63.861 r90 top value=0R
R78 "Res" RESC1608X06M 82.6,76.7 r0 top value=10K
R79 "Res" RESC1608X06M 96.9,77.375 r0 top value=10K
R80 "Res" RESC1608X06M 86.9,78.2 r270 top value=4K7
R81 "Res" RESC1608X06M 82.6,78.2 r180 top value=4K7
R82 "Res" RESC1608X06M 101.2,78.9 r270 top value=4K7
R83 "Res" RESC1608X06M 96.9,78.875 r180 top value=4K7
R84 "Res" RESC1608X06M 82.6,79.7 r180 top value=10K
R85 "Res" RESC1608X06M 96.9,80.375 r180 top value=10K
R86 "Res" RESC1608X06M 82.639,71.125 r0 top value=10K
R87 "Res" RESC1608X06M 96.9,70.7 r0 top value=10K
R88 "Res" RESC1608X06M 86.939,72.525 r270 top value=4K7
R89 "Res" RESC1608X06M 82.639,72.625 r180 top value=4K7
R90 "Res" RESC1608X06M 101.239,72.3 r270 top value=4K7
R91 "Res" RESC1608X06M 96.9,72.3 r180 top value=4K7
R92 "Res" RESC1608X06M 82.639,74.125 r180 top value=10K
R93 "Res" RESC1608X06M 96.9,73.8 r180 top value=10K
R94 "Res" RESC1608X06M 40.4,63.5 r0 top value=4K7
R95 "Res" RESC1608X06M 40.4,61.7 r0 top value=4K7
R96 "Res" RESC1608X06M 73.6,76.4 r0 top value=10K
R97 "Res" RESC1608X06M 65.8,73.3 r180 top value=10K
R98 "Res" RESC1608X06M 63.2,75.9 r270 top value=0R
R99 "Res" RESC1608X06M 61.1,50.3 r0 top value=560R
R100 "Res" RESC1608X06M 31.3,90.7 r180 top value=1K3
R101 "Res" RESC1608X06M 34.6,90.7 r0 top value=1K3
R102 "Res" RESC1608X06M 51.3,60.6 r180 top value=10K
R103 "Res" RESC1608X06M 51.3,56 r180 top value=10K
R104 "Res" RESC1608X06M 51.3,58.4 r180 top value=10K
R105 "Res" RESC2012X06N 102.55,20.4 r270 top value=47R
R106 "Res" RESC1608X06M 102.75,24.5 r0 top value=4K7
R107 "Res" RESC1608X06M 102.75,26.9 r180 top value=4K7
R108 "Res" RESC1608X06M 102.75,23 r180 top value=4K7
R109 "Res" RESC1608X06M 102.75,28.5 r180 top value=4K7
R110 "Res" RESC1608X06M 108.55,28.3 r180 top value=4K7
R111 "Res" RESC1608X06M 105.25,26.1 r270 top value=4K7
R112 "Res" RESC1608X06M 105.25,23.1 r90 top value=1K2
R113 "Res" RESC1608X06M 23.8,78.3 r270 top value=10K
R114 "Res" RESC1608X06M 51.3,53.5 r180 top value=10K
R115 "Res" RESC1608X06M 22.3,78.3 r270 top value=10K
R116 "Res" RESC2012X06N 91.2,43.2 r90 top value=47R
R117 "Res" RESC1608X06M 87.3,42.8 r90 top value=4K7
R118 "Res" RESC1608X06M 85.3,42.8 r270 top value=4K7
R119 "Res" RESC1608X06M 88.8,42.8 r270 top value=4K7
R120 "Res" RESC1608X06M 85.1,46.3 r270 top value=4K7
R121 "Res" RESC1608X06M 81.8,52.2 r0 top value=4K7
R122 "Res" RESC1608X06M 87,46 r270 top value=4K7
R123 "Res" RESC1608X06M 90,48.4 r180 top value=1K2
R124 "Res" RESC1608X06M 53,89 r270 top value=1K3
R125 "Res" RESC1608X06M 54.8,89 r270 top value=1K3
R126 "Res" RESC1608X06M 58.2,89 r270 top value=1K3
R127 "Res" RESC1608X06M 60,89 r270 top value=1K3
R128 "Res" RESC1608X06M 63.4,89 r270 top value=1K3
R129 "Res" RESC1608X06M 65.2,89 r270 top value=1K3
R130 "Res" RESC1608X06M 68.6,89 r270 top value=1K3
R131 "Res" RESC1608X06M 70.4,89 r270 top value=1K3
R132 "Res" RESC1608X06M 73.8,89 r270 top value=1K3
R133 "Res" RESC1608X06M 75.6,89 r270 top value=1K3
R134 "Res" RESC1608X06M 79,89 r270 top value=1K3
R135 "Res" RESC1608X06M 80.8,89 r270 top value=1K3
R136 "Res" RESC1608X06M 84.2,89 r270 top value=1K3
R137 "Res" RESC1608X06M 86,89 r270 top value=1K3
R138 "Res" RESC1608X06M 89.4,89 r270 top value=1K3
R139 "Res" RESC1608X06M 91.2,89 r270 top value=1K3
R140 "Res" RESC1608X06M 94.6,89 r270 top value=1K3
R141 "Res" RESC1608X06M 96.4,89 r270 top value=1K3
R142 "Res" RESC1608X06M 111.1,83.5 r180 top value=560R
R143 "Res" RESC1608X06M 111.1,78.3 r180 top value=560R
R144 "Res" RESC1608X06M 111.1,73.1 r180 top value=560R
R145 "Res" RESC1608X06M 111.1,67.9 r180 top value=560R
R146 "CRCW06030000Z0EAC" RESC1608X06M 16.7,89.3 r90 top value=0R
R147 "CRCW06030000Z0EAC" RESC1608X06M 18.6,89.3 r90 top value=0R
R148 "" RESC1608X06M 22.4,89.3 r90 top value=62K
R149 "" RESC1608X06M 24.3,89.3 r270 top value=120K
R150 "Resistor" RESC1608X06M 20.5,89.3 r90 top value=5K1
R151 "Resistor" RESC1608X06M 14.8,89.3 r90 top value=5K1
R152 "Res" RESC1608X06M 28.5,78.3 r270 top value=10K
R153 "Res" RESC2012X06N 60.9,43.2 r90 top value=47R
R154 "Res" RESC1608X06M 57.1,42.7 r90 top value=4K7
R155 "Res" RESC1608X06M 58.5,42.7 r270 top value=4K7
R156 "Res" RESC1608X06M 54.2,48.9 r270 top value=4K7
R157 "Res" RESC1608X06M 55.9,45.2 r180 top value=4K7
R158 "Res" RESC1608X06M 55.3,42.7 r90 top value=1K2
SW1 "Switch SPDT" SW_CJS-1200TA 32.8,60.1 r90 top value=CJS-1200TA
TP1 "BOOT0" TP_c200 54.5,63.3 r180 bottom
TP2 "DIO" TP_c200 44.3,91.3 r180 bottom
TP3 "CLK" TP_c200 39.8,91.3 r180 bottom
TP4 "SWO" TP_c200 35.3,91.3 r180 bottom
TP5 "RST" TP_c200 48.8,91.3 r180 bottom
TP6 "P5V" TP_c200 32.4,54.3 r0 top
TP7 "P3V" TP_c200 17.6,69.8 r0 top
TP8 "3V3" TP_c200 53.3,91.3 r180 bottom
TP9 "GND" TP_c200 57.8,91.3 r180 bottom
TP12 "I2C_SDA" TP_c200 3.8,75.4 r270 bottom
TP13 "I2C_SCL" TP_c200 11.3,75.5 r270 bottom
TP14 "RST_I/O" TP_c200 66.726,70.826 r180 bottom
TP15 "INT_I/O" TP_c200 73.326,70.826 r180 bottom
TP16 "T_ALLERT" TP_c200 72.1,48.5 r180 bottom
TP19 "SBU2" TP_c200 21.8,85.7 r0 bottom
TP20 "SBU1" TP_c200 13.4,85.3 r0 bottom
TP21 "CC1" TP_c200 2.675,84.65 r0 bottom
TP22 "CC2" TP_c200 8.625,82.975 r0 bottom
TP24 "GND" TP_c200 4.9,66.3 r0 top
U1 "DC DC" SOT95P280X145-6N 10.4,58.75 r270 top value=LV3842XDBVR
U2 "TLV75530PDBVR" SOT95P280X145-5N 26.3,66.2 r90 top value=TLV75533PDBVR
U3 "STM32F446RET6" STM-LQFP64_M 40.3,76.2 r180 top
U4 "TJA1051TK/3,118" SON65P300X300X100-9N-D 11.038,25.29 r0 top
U5 "BTS7002-1EPP" SOP65P600X115-15 41.3,36.95 r270 top value=BTS70021EPPXUMA1
U6 "BTS7002-1EPP" SOP65P600X115-15 49.5,37 r270 top value=BTS70021EPPXUMA1
U7 "BTS70041EPZXUMA1" SOP65P600X115-15 71,37 r270 top
U8 "BTS70041EPZXUMA1" SOP65P600X115-15 79,37 r270 top
U9 "TLV900" SOT95P280X145-5N 65.078,63.465 r0 top value=TLV9001IDBVR
U10 "TLV900" SOT95P280X145-5N 92.33,63.865 r0 top value=TLV9001IDBVR
U11 "TLV900" SOT95P280X145-5N 78.536,63.479 r0 top value=TLV9001IDBVR
U12 "TLV900" SOT95P280X145-5N 105.812,63.861 r0 top value=TLV9001IDBVR
U13 "MB85RC04V" SOIC127P600X175-8N 9.3,81.2 r180 top value=FM24CL16B-GTR
U14 "PCAL6524HEAZ" FP-SOT1426-1-IPC_A 68.376,79.45 r180 top
U15 "MCP9808-E/MS" MCHP-MSOP-MS8_N 64.6,44.1 r270 top
U16 "BTS70082EPZXUMA1" SOP65P600X115-15 97.05,24.5 r180 top
U17 "BTS70802EPAXUMA1" SOP65P600X115-15 87,37 r270 top
U18 "BTS7002-1EPP" SOP65P600X115-15 57.6,36.95 r270 top value=BTS70021EPPXUMA1
X1 "ABM8AIG-8.000MHZ-1Z-T" ABM8G_abracon 51.9,69.1 r90 top

## Footprints (in the part's own frame and the unit in brackets; to place one, negate y for a bottom-side part, rotate by r counter-clockwise, add the part's x,y. Pads: shape width x height; smd on the part's side, far side on the other; paste and mask are expansions set on the pad)
ABM8G_abracon [mm] "SMD Plastic Package Type  Body (2.5 x 3.2) Heigh 1mm"
  rect 1.4x1.2 smd mask+0.05: 1(-1.1,-0.85) 2(1.1,-0.85) 3(1.1,0.85) 4(-1.1,0.85)
  silkscreen extent -2.1,-2.1 1.8,1.4, body extent -1.65,-1.3 1.65,1.3, height 1
BOURNS_SDE0805A [mm]
  rect 3x7.5 smd: 1(-2.5,0) 2(2.5,0)
  silkscreen extent -0.68,-3.5 0.68,3.5, body extent -3.83,-3.5 3.83,3.5, height 5
CAPC1608X09M [mm] "Chip Capacitor, 2-Leads, Body 1,60x0,80mm, IPC Low Density"
  rect 0.95x1.1 smd: 1(-0.725,0) 2(0.725,0)
  silkscreen extent -0.2,-0.5 0.3,0.5, body extent -0.87,-0.48 0.87,0.48, height 0.92
CAPC2012X14N [mm] "Chip Capacitor, 2-Leads, Body 2,00x1,25mm, IPC Medium Density"
  rect 1.15x1.45 smd: 1(-1.1,0) 2(1.1,0)
  silkscreen extent -0.3,-0.73 0.3,0.73, body extent -1.1,-0.72 1.1,0.72, height 1.45
CAPC3216X16M [mm] "Chip Capacitor, 2-Leads, Body 3,20x1,60mm, IPC Low Density"
  rect 1x1.7 smd: 1(-1.35,0) 2(1.35,0)
  silkscreen extent -0.5,-0.85 0.5,0.85, body extent -1.7,-0.9 1.7,0.9, height 1.6
FP-SOT1426-1-IPC_A [mm]
  rect 0.961x0.239 smd paste+0 mask+0: 1(-2.476,1.75)
  rrect100% 0.961x0.239 smd paste+0 mask+0: 2(-2.476,1.25) 3(-2.476,0.75) 4(-2.476,0.25) 5(-2.476,-0.25) 6(-2.476,-0.75) 7(-2.476,-1.25) 8(-2.476,-1.75) 17(2.476,-1.75) 18(2.476,-1.25) 19(2.476,-0.75) 20(2.476,-0.25) 21(2.476,0.25) 22(2.476,0.75) 23(2.476,1.25) 24(2.476,1.75)
  rrect100% 0.239x0.961 smd paste+0 mask+0: 9(-1.75,-2.476) 10(-1.25,-2.476) 11(-0.75,-2.476) 12(-0.25,-2.476) 13(0.25,-2.476) 14(0.75,-2.476) 15(1.25,-2.476) 16(1.75,-2.476) 25(1.75,2.476) 26(1.25,2.476) 27(0.75,2.476) 28(0.25,2.476) 29(-0.25,2.476) 30(-0.75,2.476) 31(-1.25,2.476) 32(-1.75,2.476)
  rect 3.1x3.1 smd paste-1000 mask+0: 33(0,0)
  silkscreen extent -3.88,-2.5 2.5,2.5, body extent -3.46,-3.46 3.46,3.46, height 0.25
GCT-USB4105-GF-A [mm]
  rrect100% 1x2.1 hole 1.7 slot 0.6 at 0 deg paste-2539.97 mask+0: 1(-4.32,3.015) 2(4.32,3.015)
  rrect100% 1x1.8 hole 1.4 slot 0.6 at 0 deg paste-2539.97 mask+0: 3(-4.32,-1.165) 4(4.32,-1.165)
  rect 0.6x1.15 smd paste+0 mask+0: A1-B12(-3.2,3.59) A4-B9(-2.4,3.59) B1-A12(3.2,3.59) B4-A9(2.4,3.59)
  rect 0.3x1.15 smd paste+0 mask+0: A5(-1.25,3.59) A6(-0.25,3.59) A7(0.25,3.59) A8(1.25,3.59) B5(1.75,3.59) B6(0.75,3.59) B7(-0.75,3.59) B8(-1.75,3.59)
  round 0.65 hole 0.65 unplated paste-2539.97 mask+0: ""(-2.89,2.515) ""(2.89,2.515)
  silkscreen extent -4.86,-3.84 4.86,4.84, body extent -4.96,-3.94 4.96,4.27, height 0.25
INDC1608X09N [mm] "L 0603"
  rect 0.87x0.98 smd: 1(-0.665,0) 2(0.665,0)
  body extent -0.87,-0.48 0.87,0.47, height 0.95
LED0603 [mm] "Chip Diode, 2-Leads, Body 0603"
  rect 0.95x0.95 smd: A(0.75,0) C(-0.75,0)
  silkscreen extent -1.49,-0.5 0.5,0.74, body extent -0.81,-0.4 0.81,0.4, height 1.11
MCHP-MSOP-MS8_N [mm] "SOP, 8-Leads, Body 3x3mm, Pitch 0.65mm, IPC Medium Density"
  rect 1.6x0.45 smd: 1(-2.1,0.975) 2(-2.1,0.325) 3(-2.1,-0.325) 4(-2.1,-0.975) 5(2.1,-0.975) 6(2.1,-0.325) 7(2.1,0.325) 8(2.1,0.975)
  silkscreen extent -2.22,-1.5 0.9,1.88, body extent -1.5,-1.5 1.5,1.5, height 1.1
MOLEX_0477450100 [mm]
  oval 3.9x1.95 hole 1.3 slot 2.6 at 0 deg: 1(-13.5,2.55) 2(-6.75,2.55) 3(0,2.55) 4(6.75,2.55) 5(13.5,2.55)
  round 1.95 hole 1.3: 6(-15,-0.95) 7(-12.5,-0.95) 8(-10,-0.95) 9(-7.5,-0.95) 10(-5,-0.95) 11(-2.5,-0.95) 12(0,-0.95) 13(2.5,-0.95) 14(5,-0.95) 15(7.5,-0.95) 16(10,-0.95) 17(12.5,-0.95) 18(15,-0.95) 19(-15,-3.45) 20(-12.5,-3.45) 21(-10,-3.45) 22(-7.5,-3.45) 23(-5,-3.45) 24(-1.505,-3.45) 25(2.495,-3.45) 26(6.495,-3.45) 27(10.495,-3.45) 28(14.495,-3.45)
  round 4.1 hole 4.1 unplated: ""(-25.4,2.5) ""(25.4,2.5)
  round 2.3 hole 2.3 unplated: ""(-18.575,3.45) ""(18.575,3.45)
  silkscreen extent -34.95,-9.85 34.95,6.15, body extent -34.77,-41.72 35.14,4.48, height 28.43
ONSC-SMB-2 [mm] "SOJ, 2-Leads, Body 4.57x3.81mm"
  rect 2.159x2.743 smd: 1(-2.21,0) 2(2.21,0)
  silkscreen extent -3.16,-1.95 2.3,2.05, body extent -2.29,-1.91 2.28,1.91, height 2.52
RESC1608X06M [mm] "Chip Resistor, 2-Leads, Body 1,60x0,82mm, IPC Low Density"
  rect 0.9x1.05 smd: 1(-0.7,0) 2(0.7,0)
  silkscreen extent -0.25,-0.5 0.25,0.5, body extent -0.85,-0.47 0.85,0.48, height 0.55
RESC2012X06N [mm] "R 0805"
  rect 0.95x1.4 smd: 1(-0.925,0) 2(0.925,0)
  silkscreen extent -0.5,-0.75 0.5,0.75, body extent -1,-0.64 1,0.62, height 0.5
SAMTEC_FTSH-105-X-X-DV-007-P-X [mm]
  rect 0.74x2.79 smd: 1(-2.54,-2.035) 2(-2.54,2.035) 3(-1.27,-2.035) 4(-1.27,2.035) 5(0,-2.035) 6(0,2.035) 8(1.27,2.035) 9(2.54,-2.035) 10(2.54,2.035)
  silkscreen extent -3.85,-2.13 3.26,1.72, body extent -3.17,-2.92 3.17,2.92, height 6.11
"SODFL360X130-2M -AC" [mm] "SODFL, 2-Leads, Body 1,60x3,60mm, IPC Low Density"
  rect 0.9x0.8 smd: A(1.75,0) C(-1.75,0)
  silkscreen extent -2.15,-0.85 1.4,0.85, body extent -1.8,-0.8 1.8,0.8, height 1.3
SOIC127P600X175-8N [mm]
  rrect25% 1.97x0.59 smd: 1(-2.475,1.905) 2(-2.475,0.635) 3(-2.475,-0.635) 4(-2.475,-1.905) 5(2.475,-1.905) 6(2.475,-0.635) 7(2.475,0.635) 8(2.475,1.905)
  silkscreen extent -4.54,-2.52 2,2.59, body extent -3,-2.45 3,2.45, height 1.75
SON65P300X300X100-9N-D [mm]
  rect 0.8x0.35 smd: 1(-1.5,0.975) 2(-1.5,0.325) 3(-1.5,-0.325) 4(-1.5,-0.975) 5(1.5,-0.975) 6(1.5,-0.325) 7(1.5,0.325) 8(1.5,0.975)
  rect 1.75x2.5 smd: 9(0,0)
  silkscreen extent -2.02,-1.5 1,1.77, body extent -1.55,-1.5 1.55,1.5, height 1
SOP65P600X115-15 [mm] "Pitch 0.65p with EP"
  rect 1.31x0.45 smd: 1(-2.85,1.95) 2(-2.85,1.3) 3(-2.85,0.65) 4(-2.85,0) 5(-2.85,-0.65) 6(-2.85,-1.3) 7(-2.85,-1.95) 8(2.85,-1.95) 9(2.85,-1.3) 10(2.85,-0.65) 11(2.85,0) 12(2.85,0.65) 13(2.85,1.3) 14(2.85,1.95)
  rect 2.65x4 smd: 15(0,0)
  silkscreen extent -3.6,-2.5 2,2.9, body extent -3,-2.45 3,2.45, height 1.15
"SOT65P210X100-3N - AC" [mm] "SOT323, 3-Leads, Body 2,00x2,10mm, Pitch 0,65mm, IPC Medium Density"
  rect 0.85x0.5 smd: 2(-1.075,-0.65) A(-1.075,0.65) C(1.075,0)
  silkscreen extent -1.65,-1.05 0.65,1.52, body extent -1.15,-1.05 1.15,1.05, height 0.9
SOT95P240X120-3N [mm] "SOT23, 3-Leads, Body 2,92x2,40mm, Pitch 0,95mm, IPC Medium Density"
  rect 0.95x0.7 smd: 1(-1.225,0.95) 2(-1.225,-0.95) 3(1.225,0)
  silkscreen extent -1.35,-1.55 0.75,1.97, body extent -1.35,-1.56 1.35,1.56, height 1.2
SOT95P280X145-5N [mm] "SOT23, 5-Leads, Body 3,13x2,80mm, Pitch 0,95mm, IPC Medium Density"
  rect 1.1x0.6 smd: 1(-1.3,0.95) 2(-1.3,0) 3(-1.3,-0.95) 4(1.3,-0.95) 5(1.3,0.95)
  silkscreen extent -1.5,-1.5 0.8,1.92, body extent -1.4,-1.45 1.4,1.45, height 1.45
SOT95P280X145-6N [mm]
  rect 1.2x0.55 smd: 1(-1.25,0.95) 2(-1.25,0) 3(-1.25,-0.95) 4(1.25,-0.95) 5(1.25,0) 6(1.25,0.95)
  silkscreen extent -2.3,-1.46 0.7,1.8, body extent -1.42,-1.46 1.42,1.46, height 1.1
STM-LQFP64_M [mm] "QFP, 64-Leads, Body 10x10mm, Pitch 0.5mm, IPC Low Density"
  rect 1.4x0.3 smd: 1(-5.7,3.75) 2(-5.7,3.25) 3(-5.7,2.75) 4(-5.7,2.25) 5(-5.7,1.75) 6(-5.7,1.25) 7(-5.7,0.75) 8(-5.7,0.25) 9(-5.7,-0.25) 10(-5.7,-0.75) 11(-5.7,-1.25) 12(-5.7,-1.75) 13(-5.7,-2.25) 14(-5.7,-2.75) 15(-5.7,-3.25) 16(-5.7,-3.75) 33(5.7,-3.75) 34(5.7,-3.25) 35(5.7,-2.75) 36(5.7,-2.25) 37(5.7,-1.75) 38(5.7,-1.25) 39(5.7,-0.75) 40(5.7,-0.25) 41(5.7,0.25) 42(5.7,0.75) 43(5.7,1.25) 44(5.7,1.75) 45(5.7,2.25) 46(5.7,2.75) 47(5.7,3.25) 48(5.7,3.75)
  rect 0.3x1.4 smd: 17(-3.75,-5.7) 18(-3.25,-5.7) 19(-2.75,-5.7) 20(-2.25,-5.7) 21(-1.75,-5.7) 22(-1.25,-5.7) 23(-0.75,-5.7) 24(-0.25,-5.7) 25(0.25,-5.7) 26(0.75,-5.7) 27(1.25,-5.7) 28(1.75,-5.7) 29(2.25,-5.7) 30(2.75,-5.7) 31(3.25,-5.7) 32(3.75,-5.7) 49(3.75,5.7) 50(3.25,5.7) 51(2.75,5.7) 52(2.25,5.7) 53(1.75,5.7) 54(1.25,5.7) 55(0.75,5.7) 56(0.25,5.7) 57(-0.25,5.7) 58(-0.75,5.7) 59(-1.25,5.7) 60(-1.75,5.7) 61(-2.25,5.7) 62(-2.75,5.7) 63(-3.25,5.7) 64(-3.75,5.7)
  silkscreen extent -5.82,-4.6 4.6,4.6, body extent -6,-6 6,6, height 1.62
SW_CJS-1200TA [mm]
  rect 1x1.6 smd: 1(-1.75,-1.15) 2(0,1.15) 3(1.75,-1.15)
  silkscreen extent -2.7,-2.46 2.7,1.25, body extent -2.7,-1.4 2.7,1.4, height 2.5
TP_c200 [mm] "TP SMD D.2mm"
  round 2 smd paste-5: 1(0,0)
  silkscreen extent -2,-2 2,2
WURTH-SBTW_3528 [mm] "SMD Bi-color TOP LED, body 3.2x2.8mm"
  rect 1.5x0.9 smd: A1(1.55,0.7) A2(1.55,-0.7) C1(-1.55,0.7) C2(-1.55,-0.7)
  silkscreen extent -1.7,-1.5 0.5,1.81, body extent -1.75,-1.4 1.75,1.4, height 1.9
WURTH_74651195 [mm] "Shank, THR, 9 pins, 10x10mm, M5, thread 7mm"
  round 3.2 hole 1.85: 1(-4.435,-4.435) 1(-4.435,0) 1(-4.435,4.435) 1(0,-4.435) 1(0,0) 1(0,4.435) 1(4.435,-4.435) 1(4.435,0) 1(4.435,4.435)
  body extent -5,-5 5,5, height 10.5